# EAGLE board Questão 3 (EAGLE 7.6.0)

Size 56.82 x 53.33 mm. Coordinates in mm from the lower left corner, seen from the top.
Outline: 0,0 56.82,0 56.82,53.33 0,53.33 0,0
Copper layers (1*16): Top 0.035mm / dielectric 1.5mm / Bottom 0.035mm
Design rules "default": minimum track width 10mil, minimum drill 24mil, track to track 8mil, track to pad 8mil, pad to pad 8mil, via to via 8mil, smd to smd 8mil, copper to edge 40mil, drill to drill 8mil, minimum pad ring 10mil, minimum via ring 8mil, stop-mask expansion 4mil, vias tented up to drill 0mil, thermal gap 10mil

## Footprints (pad centres in the part's own frame; a part is rotated, then mirrored left to right if it is on the bottom)
0207/10 = drill 0.813 octagon: 1 -5.08,0; 2 5.08,0
PHOTORESISTOR-2.54 = drill 1 pad 1.5: P$1 -1.27,0; P$2 1.27,0

## Placement (x,y rotation side)
R1  330‎Ω  [0207/10]  5,35.48 0 top
R2  [PHOTORESISTOR-2.54]  5,10.08 0 top
R3  10k‎Ω  [0207/10]  5,22.78 0 top

## Library data of the parts
R1-R3 = AUTODESK_CIRCUITS_BREADBOARD

## Nets
N$1: R2.P$2 R3.1
N$2: R2.P$1
N$3: R1.1 R3.2
N$7: R1.2

## Tracks (layer width: path | path; a pad name or v marks a point on that pad's centre or on a via)
N$1  (1 unrouted)
N$3  (1 unrouted)